# EAGLE board ECU (EAGLE 6.5.0)
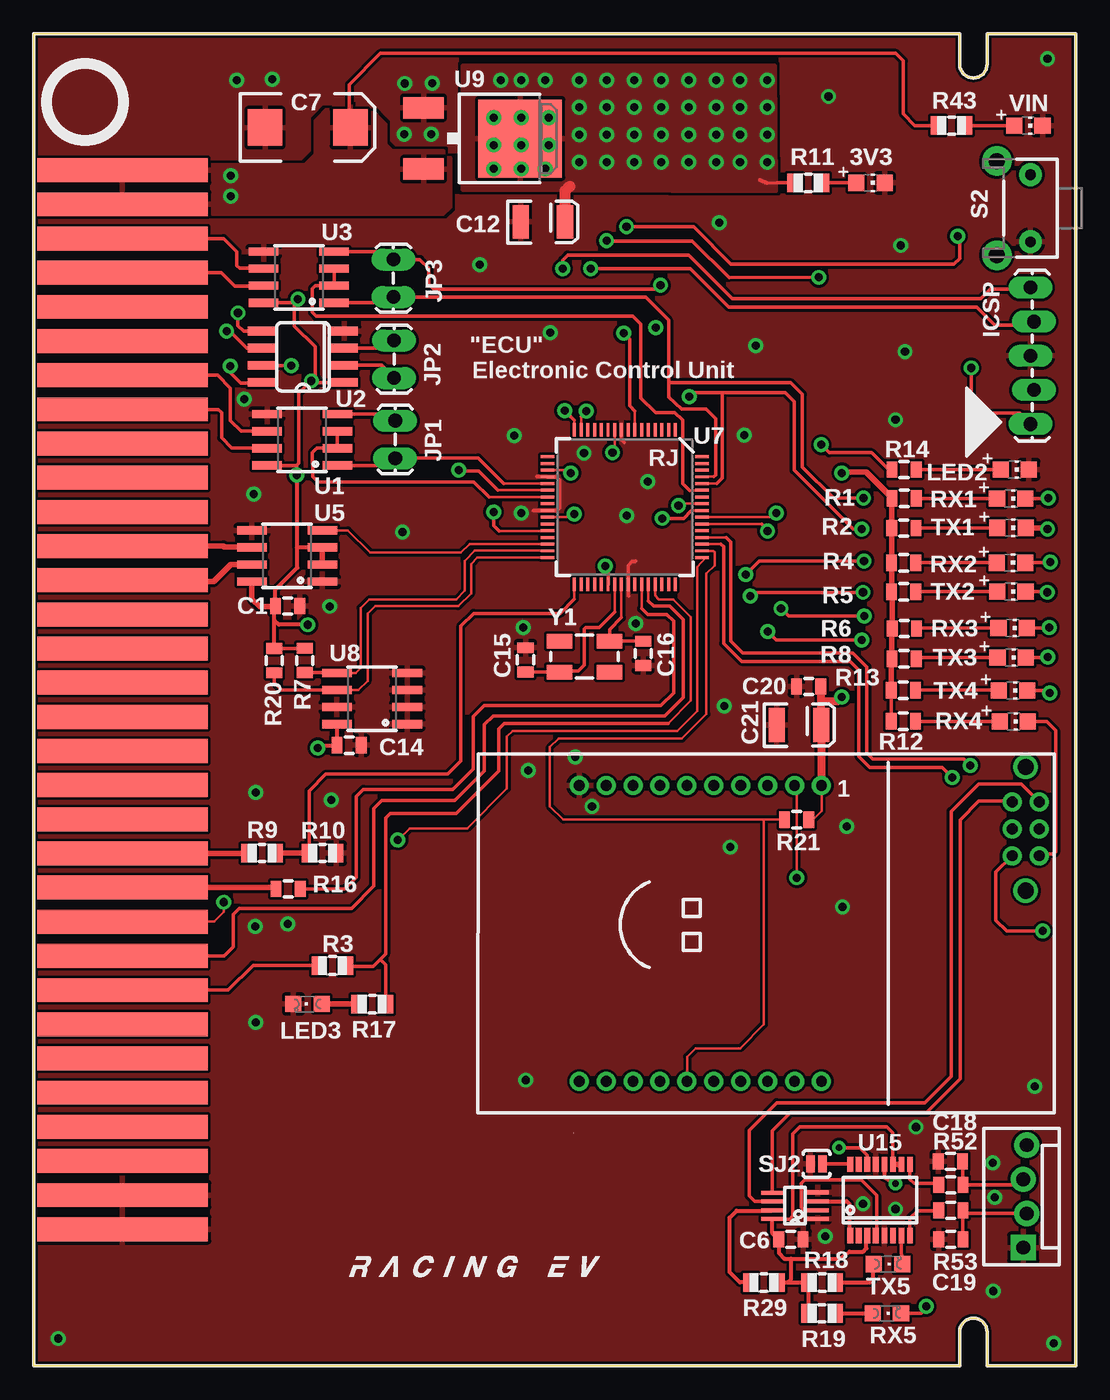
[diagram p0: board, top side]
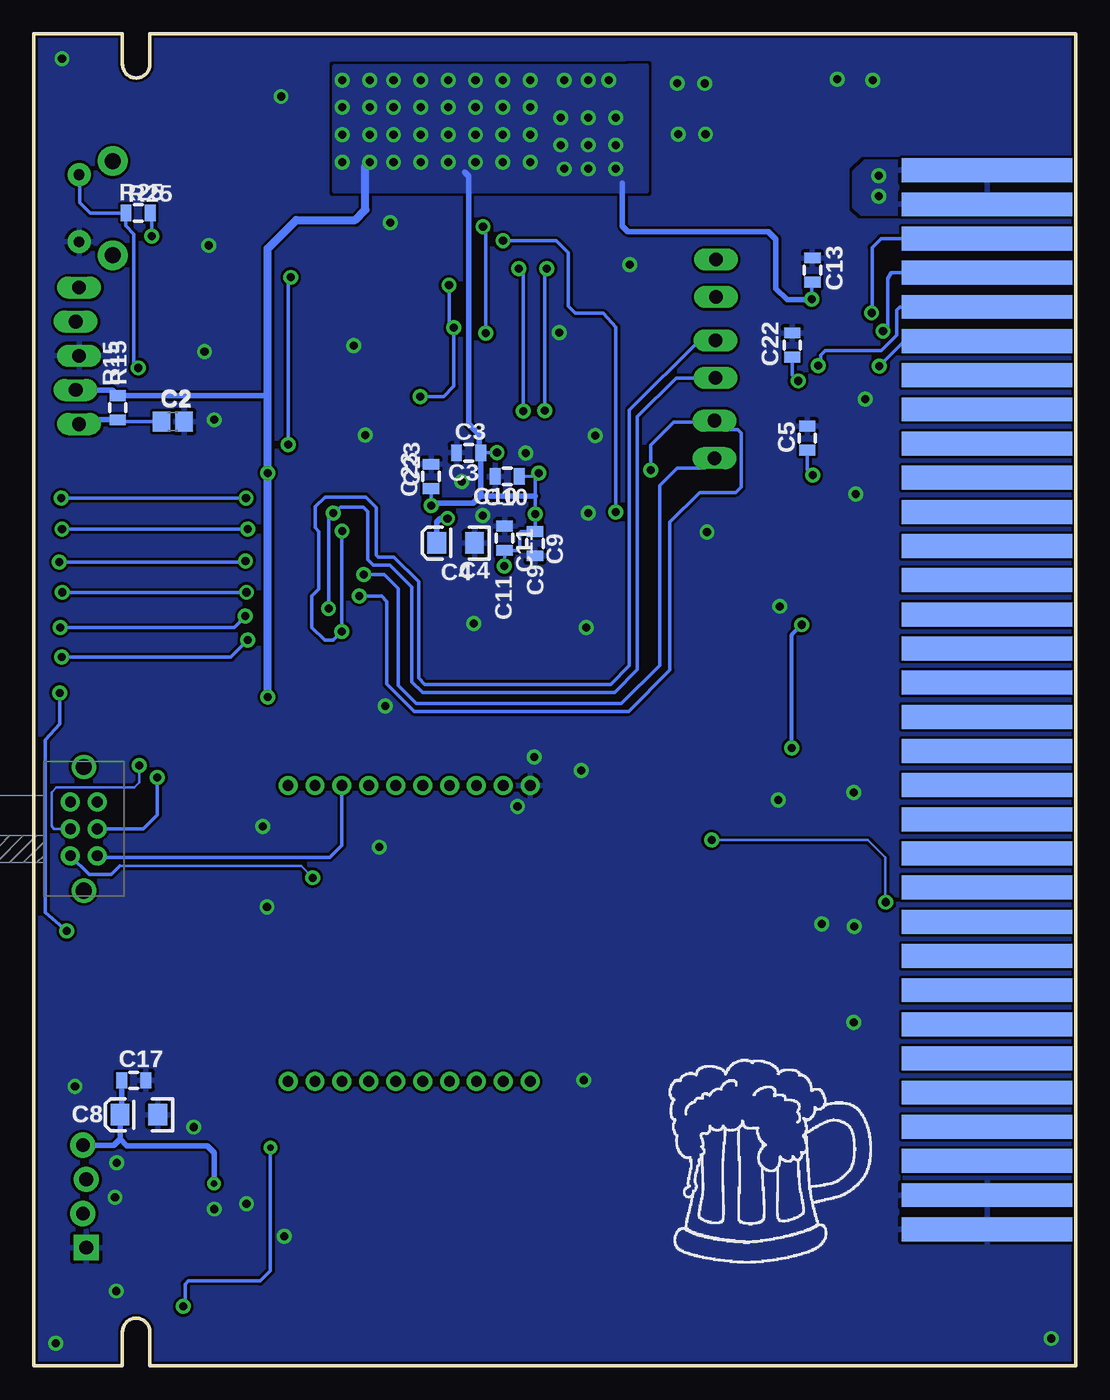
[diagram p1: board, bottom side, seen from below]

Size 77.47 x 99.06 mm. Coordinates in mm from the lower left corner, seen from the top.
Copper layers (1*16): Top 0.035mm / dielectric 1.5mm / Bottom 0.035mm
Design rules "SparkFun": minimum track width 8mil, minimum drill 20mil, track to track 8mil, track to pad 8mil, pad to pad 8mil, via to via 8mil, smd to smd 8mil, copper to edge 10mil, drill to drill 8mil, minimum pad ring 12mil, minimum via ring 10mil, stop-mask expansion 4mil, vias tented up to drill 25mil, thermal gap 10mil

## Footprints (pad centres in the part's own frame; a part is rotated, then mirrored left to right if it is on the bottom)
CHIP-LED0805 = smd 1.2 x 1.2: A 0,-1.05; C 0,1.05
0805 = smd 0.8 x 1.2: 1 -0.9,0; 2 0.9,0
C0805 = smd 1.3 x 1.5: 1 -0.85,0; 2 0.85,0
EIA3216 = smd 1.4 x 1.6: A 1.4,0; C -1.4,0
EIA7343 = smd 2.55 x 2.7: A 3.17,0; C -3.17,0
EIA3528 = smd 1.2 x 2.5: A 1.65,0; C -1.65,0
CARD-64 = smd 1.778 x 12.7: 1 10.16,6.604; 2 12.7,6.604; 3 15.24,6.604; 4 17.78,6.604; 5 20.32,6.604; 6 22.86,6.604; 7 25.4,6.604; 8 27.94,6.604; 9 30.48,6.604; 10 33.02,6.604; 11 35.56,6.604; 12 38.1,6.604; 13 40.64,6.604; 14 43.18,6.604; 15 45.72,6.604; 16 48.26,6.604; 17 50.8,6.604; 18 53.34,6.604; 19 55.88,6.604; 20 58.42,6.604; 21 60.96,6.604; 22 63.5,6.604; 23 66.04,6.604; 24 68.58,6.604; 25 71.12,6.604; 26 73.66,6.604; 27 76.2,6.604; 28 78.74,6.604; 29 81.28,6.604; 30 83.82,6.604; 31 86.36,6.604; 32 88.9,6.604 | smd 1.778 x 12.7 bottom: 33 10.16,6.604; 34 12.7,6.604; 35 15.24,6.604; 36 17.78,6.604; 37 20.32,6.604; 38 22.86,6.604; 39 25.4,6.604; 40 27.94,6.604; 41 30.48,6.604; 42 33.02,6.604; 43 35.56,6.604; 44 38.1,6.604; 45 40.64,6.604; 46 43.18,6.604; 47 45.72,6.604; 48 48.26,6.604; 49 50.8,6.604; 50 53.34,6.604; 51 55.88,6.604; 52 58.42,6.604; 53 60.96,6.604; 54 63.5,6.604; 55 66.04,6.604; 56 68.58,6.604; 57 71.12,6.604; 58 73.66,6.604; 59 76.2,6.604; 60 78.74,6.604; 61 81.28,6.604; 62 83.82,6.604; 63 86.36,6.604; 64 88.9,6.604
1X05_LOCK_LONGPADS = drill 1.016 long: 1 0,0; 2 2.54,-0.254; 3 5.08,0; 4 7.62,-0.254; 5 10.16,0
1X02_LOCK_LONGPADS = drill 1.016 long: 1 -0.127,0; 2 2.667,0
MOLEX-1X4_LOCK = drill 1.016 pad 1.88 square: 1 0,0.127 | drill 1.016 pad 1.88: 2 2.54,-0.127; 3 5.08,0.127; 4 7.62,-0.127
CHIPLED_0805 = smd 1.2 x 1.2: A 0,-1.05; C 0,1.05
R0805 = smd 1.1 x 1.4: 1 -1,0; 2 1,0
EG2211 = drill 0.8: P1 -1,0; P1-TA -1,2; P1-TB -1,-2; P2 1,0; P2-TA 1,2; P2-TB 1,-2 | drill 1.2: P$7 0,4.6; P$8 0,-4.6
TACTILE-PTH-SIDEEZ = drill 0.8 pad 1.7: 1 -2.5,0; 2 2.5,0 | drill 1.2 pad 2.2: ANCHOR1 -3.5,2.5; ANCHOR2 3.5,2.5
PAD-JUMPER-2-NO_YES_SILK = smd 0.635 x 1.27: 1 -0.45,0; 2 0.45,0
SO-8 = smd 0.61 x 2.21: 1 -1.905,-2.616; 2 -0.635,-2.616; 3 0.635,-2.616; 4 1.905,-2.616; 5 1.905,2.616; 6 0.635,2.616; 7 -0.635,2.616; 8 -1.905,2.616
SO08 = smd 0.66 x 2.032: 1 -1.905,-3.073; 2 -0.635,-3.073; 3 0.635,-3.073; 4 1.905,-3.073; 5 1.905,3.073; 6 0.635,3.073; 7 -0.635,3.073; 8 -1.905,3.073
VFSOP-8 = smd 0.3 x 1.6: 1 -0.98,-1.7; 2 -0.33,-1.7; 3 0.33,-1.7; 4 0.98,-1.7; 5 0.97,1.69; 6 0.325,1.7; 7 -0.33,1.7; 8 -0.98,1.71
RM024-TH = drill 0.8: 1 9,11; 2 7,11; 3 5,11; 4 3,11; 5 1,11; 6 -1,11; 7 -3,11; 8 -5,11; 9 -7,11; 10 -9,11; 11 -9,-11; 12 -7,-11; 13 -5,-11; 14 -3,-11; 15 -1,-11; 16 1,-11; 17 3,-11; 18 5,-11; 19 7,-11; 20 9,-11
TQFP-64 = smd 0.22 x 1: 1 -3.75,-5.75; 2 -3.25,-5.75; 3 -2.75,-5.75; 4 -2.25,-5.75; 5 -1.75,-5.75; 6 -1.25,-5.75; 7 -0.75,-5.75; 8 -0.25,-5.75; 9 0.25,-5.75; 10 0.75,-5.75; 11 1.25,-5.75; 12 1.75,-5.75; 13 2.25,-5.75; 14 2.75,-5.75; 15 3.25,-5.75; 16 3.75,-5.75; 33 3.75,5.75; 34 3.25,5.75; 35 2.75,5.75; 36 2.25,5.75; 37 1.75,5.75; 38 1.25,5.75; 39 0.75,5.75; 40 0.25,5.75; 41 -0.25,5.75; 42 -0.75,5.75; 43 -1.25,5.75; 44 -1.75,5.75; 45 -2.25,5.75; 46 -2.75,5.75; 47 -3.25,5.75; 48 -3.75,5.75 | smd 1 x 0.22: 17 5.75,-3.75; 18 5.75,-3.25; 19 5.75,-2.75; 20 5.75,-2.25; 21 5.75,-1.75; 22 5.75,-1.25; 23 5.75,-0.75; 24 5.75,-0.25; 25 5.75,0.25; 26 5.75,0.75; 27 5.75,1.25; 28 5.75,1.75; 29 5.75,2.25; 30 5.75,2.75; 31 5.75,3.25; 32 5.75,3.75; 49 -5.75,3.75; 50 -5.75,3.25; 51 -5.75,2.75; 52 -5.75,2.25; 53 -5.75,1.75; 54 -5.75,1.25; 55 -5.75,0.75; 56 -5.75,0.25; 57 -5.75,-0.25; 58 -5.75,-0.75; 59 -5.75,-1.25; 60 -5.75,-1.75; 61 -5.75,-2.25; 62 -5.75,-2.75; 63 -5.75,-3.25; 64 -5.75,-3.75
SO08' = smd 0.61 x 2.21: 1 -1.905,-2.616; 2 -0.635,-2.616; 3 0.635,-2.616; 4 1.905,-2.616; 5 1.905,2.616; 6 0.635,2.616; 7 -0.635,2.616; 8 -1.905,2.616
V-REG_DPACK = smd 1.6 x 3: 1 -2.28,-4.8; 3 2.28,-4.8 | smd 5.8 x 6.2: 4 0,2.38
SSOP-16 = smd 0.419 x 1.143: 1 -2.223,-2.642; 2 -1.587,-2.642; 3 -0.953,-2.642; 4 -0.318,-2.642; 5 0.318,-2.642; 6 0.953,-2.642; 7 1.587,-2.642; 8 2.223,-2.642; 9 2.223,2.642; 10 1.587,2.642; 11 0.953,2.642; 12 0.318,2.642; 13 -0.318,2.642; 14 -0.953,2.642; 15 -1.587,2.642; 16 -2.223,2.642
CRYSTAL-SMD-5X3 = smd 1.9 x 1.1: 1 -1.85,-1.15; 2 1.85,-1.15; 3 1.85,1.15; 4 -1.85,1.15

## Placement (x,y rotation side)
3V3  [CHIP-LED0805]  62.2,87.96 270 top
C1  0.1uF  [0805]  18.88,56.5 0 top
C2  10n  [C0805]  67.13,70.22 0 bottom
C3  0.1uF  [0805]  45.14,67.89 180 bottom
C4  10uF  [EIA3216]  46.1,61.19 180 bottom
C5  0.1uF  [0805]  19.96,68.99 90 bottom
C6  0.1uf  [0805]  56.29,9.4 0 top
C7  10uF  [EIA7343]  20.37,92.08 0 top
C8  4.7uF  [EIA3216]  69.65,18.67 180 bottom
C9  0.1uF  [0805]  40.21,61.14 270 bottom
C10  0.1uF  [0805]  42.27,66.14 180 bottom
C11  0.1uF  [0805]  42.47,61.54 270 bottom
C12  10uf  [EIA3528]  37.85,85.06 0 top
C13  0.1uF  [0805]  19.58,81.48 90 bottom
C14  0.1uF  [0805]  23.46,46.15 0 top
C15  12pF  [0805]  36.56,52.5 90 top
C16  12pF  [0805]  45.3,52.97 270 top
C17  0.1uf  [0805]  70.03,21.23 0 bottom
C18  47pf  [0805]  68.15,15.21 180 top
C19  47pf  [0805]  68.17,9.4 180 top
C20  0.1uF  [0805]  57.61,50.52 180 top
C21  10uf  [EIA3528]  56.9,47.65 0 top
C22  0.1uF  [0805]  21.08,75.91 90 bottom
C23  0.1uF  [0805]  47.93,66.14 90 bottom
CARD1  CARD  [CARD-64]  0,99.06 270 top
ICSP  ICSP  [1X05_LOCK_LONGPADS]  74.09,70.03 90 top
JP1  M02LOCK_LONGPADS  [1X02_LOCK_LONGPADS]  26.87,70.15 270 top
JP2  M02LOCK_LONGPADS  [1X02_LOCK_LONGPADS]  26.8,76.12 270 top
JP3  M02LOCK_LONGPADS  [1X02_LOCK_LONGPADS]  26.75,82.14 270 top
JP13  [MOLEX-1X4_LOCK]  73.69,8.79 90 top
LED2  [CHIP-LED0805]  72.92,66.65 270 top
LED3  Green  [CHIPLED_0805]  20.36,26.91 90 top
R1  1k  [0805]  64.71,64.51 0 top
R2  1k  [0805]  64.68,62.3 0 top
R3  0  [R0805]  22.21,29.76 0 top
R4  1k  [0805]  64.67,59.72 0 top
R5  1k  [0805]  64.67,57.56 0 top
R6  1k  [0805]  64.72,54.84 0 top
R7  2k  [0805]  20.14,52.45 90 top
R8  1k  [0805]  64.69,52.58 0 top
R9  30k  [R0805]  16.98,38.13 180 top
R10  10k  [R0805]  21.48,38.13 180 top
R11  499  [R0805]  57.57,87.96 180 top
R12  1k  [0805]  64.64,47.93 0 top
R13  1k  [0805]  64.64,50.24 0 top
R14  499  [0805]  64.69,66.65 180 top
R15  10k  [0805]  71.21,71.25 90 bottom
R16  1k  [0805]  18.92,35.47 0 top
R17  1k  [R0805]  25.17,26.9 0 top
R18  1K  [R0805]  58.6,6.2 180 top
R19  1k  [R0805]  58.6,3.91 180 top
R20  2k  [0805]  17.89,52.44 90 top
R21  1k  [0805]  56.72,40.61 180 top
R25  499  [0805]  69.7,85.72 0 bottom
R29  1K  [R0805]  54.28,6.2 0 top
R43  1k  [R0805]  68.22,92.23 180 top
R52  27  [0805]  68.17,13.46 180 top
R53  27  [0805]  68.17,11.56 180 top
RX1  [CHIP-LED0805]  72.65,64.5 270 top
RX2  [CHIP-LED0805]  72.64,59.72 270 top
RX3  [CHIP-LED0805]  72.77,54.86 270 top
RX4  [CHIP-LED0805]  72.85,47.9 270 top
RX5  [CHIPLED_0805]  63.42,3.91 270 top
S1  [EG2211]  73.74,39.93 0 bottom
S2  ts  [TACTILE-PTH-SIDEEZ]  74.09,86.08 90 top
SJ2  [PAD-JUMPER-2-NO_YES_SILK]  58.19,15.01 0 top
TX1  [CHIP-LED0805]  72.68,62.31 270 top
TX2  [CHIP-LED0805]  72.67,57.58 270 top
TX3  [CHIP-LED0805]  72.69,52.68 270 top
TX4  [CHIP-LED0805]  72.8,50.22 270 top
TX5  [CHIPLED_0805]  63.5,7.57 270 top
U1  SN75HVD08DR  [SO-8]  19.96,68.86 90 top
U2  ISL83077  [SO08]  20.02,75.03 90 top
U3  SN75HVD08DR  [SO-8]  19.71,80.95 90 top
U4  SN74LVC2G241DCTR  [VFSOP-8]  56.59,11.91 90 top
U5  SN75HVD08DR  [SO-8]  18.85,60.22 90 top
U6  RM024  [RM024-TH]  49.56,32.16 0 top
U7  DSPIC33EP256GM306  [TQFP-64]  43.94,63.86 180 top
U8  CAT24M01WI-GT3  [SO08']  25.16,49.62 90 top
U9  NCP1117DT33T5G  [V-REG_DPACK]  33.78,91.26 270 top
U15  FT230X  [SSOP-16]  62.92,12.34 0 top
U$1  INDPK1  [PICKIT-PIN-1]  71.89,70.18 90 top
U$2  LOGOM  [L-M]  15.95,4.6 0 top
U$3  BEERM  [B-M]  30.23,7.65 0 bottom
VIN  [CHIP-LED0805]  73.94,92.2 270 top
Y1  12Mhz  [CRYSTAL-SMD-5X3]  40.94,52.73 0 top

## Library data of the parts
3V3 C2 LED2 LED3 R3 R9-R11 R17-R19 R29 R43 RX1-RX5 TX1-TX5 VIN = adafruit
C1 C3 C5 C7 C9-C16 C20-C23 = SparkFun-Capacitors
C4 = SparkFun-Capacitors; PROD_ID: CAP-00811
C6 C8 C17-C19 = SparkFun
CARD1 U1 U3 U5-U7 U15 U$1 = FSAE Eletric
ICSP JP1-JP3 JP13 = SparkFun-Connectors
R1 R2 R4-R8 R12-R16 R20 R21 R52 R53 SJ2 = SparkFun-Passives
R25 = SparkFun-Resistors
S1 S2 = SparkFun-Electromechanical
U2 = NASA_LIB
U4 = Cleaverbrooks
U8 = SparkFun-DigitalIC
U9 = SparkFun-PowerIC
U$2 U$3 = Pic
Y1 = SparkFun-FreqCtrl

## Nets
3V: C6.1 R18.2 R19.2 R29.2 U4.8 U15.3 U15.10 U15.11
+3V3: C1.1 C3.1 C5.1 C9.1 C10.1 C11.2 C12.A C13.1 C14.1 C20.1 C21.A C22.1 C23.1 ICSP.2 R1.1 R2.1 R4.1 R5.1 R6.1 R7.2 R8.1 R11.2 R12.1 R13.1 R15.2 R20.2 R21.1 U1.8 U2.1 U3.8 U5.2 U5.3 U5.8 U6.1 U7.10 U7.19 U7.26 U7.38 U7.57 U8.8 U9.4
+9V: C7.A CARD1.1 CARD1.2 CARD1.33 CARD1.34 R43.2 U9.3
BRAKELIGHT: CARD1.24 U7.44
ECU-SS-IN: CARD1.21 R9.2
GND: 3V3.C C1.2 C2.2 C3.2 C4.C C5.2 C6.2 C7.C C8.C C9.2 C10.2 C11.1 C12.C C13.2 C14.2 C15.2 C16.2 C17.2 C18.2 C19.2 C20.2 C21.C C22.2 C23.2 CARD1.31 CARD1.32 CARD1.63 CARD1.64 ICSP.3 JP13.1 LED2.C LED3.C R10.1 S2.1 SJ2.1 U1.5 U2.4 U3.5 U4.1 U4.4 U5.1 U5.5 U6.10 U7.9 U7.20 U7.25 U7.41 U8.1 U8.2 U8.3 U8.4 U8.7 U9.1 U15.5 U15.13 VIN.C
HORN: CARD1.22 R16.1
HORNEN: CARD1.23 U7.49
INRG: R21.2 U6.15 U7.50
LED-A: CARD1.12 U5.6
LED-B: CARD1.13 U5.7
LED-DATA: U5.4 U7.30
N$1: U7.46
N$2: R14.2 U7.28
N$3: 3V3.A R11.1
N$4: R18.1 TX5.A
N$5: R4.2 RX2.A
N$6: R5.2 TX2.A
N$7: R1.2 RX1.A
N$8: R2.2 TX1.A
N$9: R6.2 RX3.A
N$10: R8.2 TX3.A
N$11: R12.2 RX4.A
N$12: R13.2 TX4.A
N$13: C16.1 U7.40 Y1.3
N$14: C15.1 U7.39 Y1.1
N$15: LED2.A R14.1
N$16: R7.1 U7.31 U8.5
N$18: R19.1 RX5.A
N$19: TX5.C U15.7
N$20: RX5.C U15.14
N$21: U4.2 U15.4
N$27: U4.3 U15.1
N$28: R52.2 U15.9
N$32: R20.1 U7.32 U8.6
N$33: R43.1 VIN.A
N$49: LED3.A R17.1
N$54: R53.2 U15.8
N$55: C18.1 JP13.3 R52.1
N$61: C19.1 JP13.2 R53.1
N$62: SJ2.2 U15.16
N$69: R29.1 U4.7
N$85: C8.A C17.1 JP13.4 U15.12
N$86: C2.1 ICSP.1 R15.1 R25.1 S2.2
N$87: R25.2 U7.7
N$88: C4.A U7.56
N$90: ICSP.4 U7.15
N$91: ICSP.5 U7.16
RS485-1-A: CARD1.3 U3.6
RS485-1-B: CARD1.4 U3.7
RS485-2-A: CARD1.7 U1.6
RS485-2-B: CARD1.8 U1.7
RS-TM-A: CARD1.38 U2.8
RS-TM-B: CARD1.37 U2.7
RS-TM-Y: CARD1.35 U2.5
RS-TM-Z: CARD1.36 U2.6
RTD-HORN: R16.2 U7.43
RX: S1.P1 U7.52
RXD0: JP3.2 RX1.C U3.1 U7.61
RXD1: JP1.2 RX2.C U1.1 U7.21
RXD2: JP2.2 RX3.C U2.2 U7.55
RXD3: S1.P1-TA U4.6
RXD4: RX4.C S1.P1-TB U6.2
SS: R3.2 R17.2 U7.45
SS-D: R9.1 R10.2 U7.33
SS-ECU-RELAY: CARD1.25 R3.1
TX: S1.P2 U7.51
TXD0: JP3.1 TX1.C U3.4 U7.60
TXD1: JP1.1 TX2.C U1.4 U7.22
TXD2: JP2.1 TX3.C U2.3 U7.54
TXD3: S1.P2-TA U4.5
TXD4: S1.P2-TB TX4.C U6.3
U1-EN: U1.2 U1.3 U7.23
U3-EN: U3.2 U3.3 U7.59

## Tracks (layer width: path | path; a pad name or v marks a point on that pad's centre or on a via)
3V
  Top 0.254: U15.11 63.87,17.31 63.42,17.75 56.95,17.75 56.44,17.25 56.44,11.15 56.19,10.9 54.92,10.9 U4.8
  Top 0.305: 61.9,9.77 U15.3 61.9,9.64 61.9,8.74 61.65,8.48 60.63,8.48 59.87,7.98 56.31,7.98 | U4.8 54.88,9.9 C6.1 55.39,8.39 55.8,7.98 56.31,7.98 | 56.31,7.98 56.31,6.45 56.06,6.2 R29.2 R18.2 R19.2
  Top 0.406: U15.10 U15.11 64.29,14.99 64.44,14.83
+3V3  (via drill 0.6)
  Top 0.203: U7.26 39.94,63.11 | U7.19 39.72,66.61 | 48.13,64.11 U7.57 | U7.10 43.19,68.08 | R21.1 57.94,40.62 58.57,41.25 58.57,43.14 U6.1
  Top 0.254: 39.94,63.11 v40.18,63.35 | 39.72,66.61 v39.93,66.4 | v47.93,63.98 48.01,63.98 48.13,64.11 | 43.19,68.08 v43.03,67.92 | U7.38 42.69,59.19 v42.49,59.46 | R12.1 R13.1 | R11.2 55.27,87.96 54.51,87.95 | U3.8 19.38,79.05 | 19.38,79.05 v19.65,79.31 | v20.65,73.24 20.79,73.1 23.06,73.1 U2.1 | 19.38,79.05 19.38,77.32 20.92,75.78 20.92,73.51 v20.65,73.24 | U1.8 19.53,66.95 | 19.53,66.95 19.72,67.14 19.72,72.31 v20.65,73.24 | v19.56,66.23 19.56,66.93 19.53,66.95 | 18.2,56.72 C1.1 | 19.57,60.86 19.56,60.87 | R7.2 20.13,53.34 R20.2
  Top 0.305: 54.51,87.95 54,88.16 | 58.55,50.48 58.55,49.48 58.6,49.43 | C14.1 22.56,47.7 U8.8 22.54,46.2 22.43,46.09 21.26,46.09 v21.12,45.95 | v20.38,55.1 18.22,55.1 17.89,55.44 | R20.2 17.89,55.44 | 17.89,55.44 17.89,56.41 C1.1 17.93,56.55 17.93,57.68 19.61,59.36 19.61,60.82 19.56,60.87 19.56,60.98 | v19.56,66.23 19.56,60.98 | U5.3 19.68,60.86 19.56,60.98
  Top 0.406: R13.1 63.74,52.53 R8.1 63.79,54.81 R6.1 63.82,57.51 R5.1 R4.1 63.77,62.28 R2.1 63.78,64.48 R1.1 63.81,64.54 61.87,66.47 60.15,66.47 v60.07,66.4 | U5.8 16.23,57.02 16.8,56.45 17.93,56.45 C1.1 | U5.3 U5.2
  Top 0.61: U6.1 58.55,43.17 C21.A 58.55,50.48 C20.1 | 58.6,49.43 59.77,49.43 v60.07,49.73
  Top 0.813: C12.A 39.5,87.35 39.85,87.71
  Bottom 0.254: C10.1 40.16,66.15 v39.93,66.4 40.18,66.14 40.18,64.67 v40.18,63.35 40.18,62.06 C9.1 41.26,62.04 41.35,61.95 41.35,60.81 41.53,60.63 42.45,60.63 C11.2 v42.49,59.46 | C23.1 v47.93,63.98 | v43.03,67.92 44.21,67.92 C3.1 | v19.65,79.31 19.65,80.52 C13.1 | C22.1 21.08,73.67 v20.65,73.24 | C5.1 19.96,66.64 v19.56,66.23
  Bottom 0.305: v21.12,45.95 21.12,54.37 v20.38,55.1
  Bottom 0.406: 44.24,64.73 C3.1 44.35,68.01 44.35,69.24 45.14,70.03 45.14,88.47 45.41,88.75 | 44.24,64.73 44.17,64.67 40.18,64.67 | 44.24,64.73 44.24,64.7 44.78,64.16 47.75,64.16 v47.93,63.98 | ICSP.2 71.63,72.57 R15.2 60.12,72.15 60.07,72.2 | 33.72,87.92 33.72,84.76 33.3,84.34 22.86,84.34 22.3,83.78 22.3,80.11 21.46,79.27 19.68,79.27 v19.65,79.31
  Bottom 0.61: v60.07,49.73 v60.07,66.4 60.07,72.2 60.07,83.08 57.96,85.19 53.57,85.19 52.81,85.95 52.81,89.2 v52.5,89.51
  other vias: 34.72,95.61 36.25,95.61 38.02,95.61 40.56,95.61 40.56,93.57 40.56,91.54 40.56,89.51 42.6,95.61 42.6,93.57 42.6,91.54 42.6,89.51 44.63,95.61 44.63,93.57 44.63,91.54 44.63,89.51 46.66,95.61 46.66,93.57 46.66,91.54 46.66,89.51 48.69,95.61 48.69,93.57 48.69,91.54 48.69,89.51 50.72,95.61 50.72,93.57 50.72,91.54 50.72,89.51 52.5,95.61 52.5,93.57 52.5,91.54 54.53,95.61 54.53,93.57 54.53,91.54 54.53,89.51 34.21,90.78 36.25,90.78 34.21,89 36.25,89 38.02,89 38.28,90.78 38.28,92.81 36.25,92.81 34.21,92.81
  pour Bottom: 33.15,96.6 55.09,96.6 55.09,87.38 31.93,87.38 31.93,96.62 33.2,96.62
  pour Top: 31.93,96.62 55.04,96.62 55.12,87.39 31.93,87.48
+9V  (via drill 0.6)
  Top 0.254: R43.2 65.51,92.23 64.64,93.09 64.64,97.03 64.08,97.59 25.78,97.59 23.47,95.28 23.47,92.15 C7.A
  other vias: 14.66,88.49 14.66,86.97
  pour Top: 7.04,89.26 20.24,89.26 21.01,90.02 21.01,92.56 22.02,93.57 24.82,93.57 26.09,92.3 26.09,90.78 26.59,90.27 30.4,90.27 30.91,89.76 30.91,86.21 30.4,85.7 6.53,85.7 6.02,86.21 6.02,88.24
  pour Bottom: 5.77,89.51 15.67,89.51 16.43,88.75 16.43,86.21 15.93,85.7 5.77,85.7
BRAKELIGHT
  Top 0.203: 45.7,56.87 U7.44
  Top 0.254: CARD1.24 14.16,30.48 14.83,31.15 14.83,33.57 15.29,34.02 23.64,34.02 25.29,35.67 25.29,41.45 25.86,42.02 31.29,42.02 33.5,44.23 33.5,47.68 34.16,48.34 46.91,48.34 48.27,49.7 48.27,55.5 47.28,56.49 46.08,56.49 45.7,56.87
ECU-SS-IN
  Top 0.406: CARD1.21 15.98,38.1 R9.2
GND  (via drill 0.6)
  Top 0.203: U7.9 43.69,68.88
  Top 0.254: 37.52,66.14 37.39,66.14 37.42,66.11 U7.20 38.86,66.1 39.12,65.85 39.12,63.79 38.93,63.61 U7.25 37.14,63.61 37.13,63.6 | 44.22,57.25 44.19,57.28 U7.41 44.19,59.51 44.48,59.79 44.7,59.79 44.76,59.84 | 43.69,68.88 43.92,68.66
  other vias: 1.83,2.03 75.36,97.21 75.82,1.68 64.06,70.35 71.32,5.56 61.65,12.04 58.85,9.63 64.06,11.66 65.58,17.75 71.42,12.55 71.3,15.09 27.58,95.35 29.62,95.38 27.53,91.59 29.57,91.59 45.64,65.76 40.91,67.87 44.09,63.22 15.09,95.58 17.74,95.67 15.66,71.89 35.74,69.16 27.42,62 36.25,63.41 44.75,55.19 38.4,76.82 53.67,75.87 33.15,81.88 50.95,85 64.44,83.31 64.77,75.43 52.83,69.22 40.27,45.26 51.35,49.07 59.08,94.39 36.39,54.89 22.12,42.08 16.48,32.68 18.88,32.87 16.37,64.83 22.02,56.48 16.51,42.62 16.52,25.54 41.5,41.59 60.43,40.12 60.12,34.12 51.79,38.57 36.58,21.25 36.75,44.26 74.4,20.79
  pour Top (rank 4): 0,0 77.44,0.05 77.44,99.03 0.1,99.18
  pour Bottom (rank 4): 0,-0.05 77.47,0.13 77.47,99.16 0.08,99.21
HORN
  Top 0.406: CARD1.22 18.02,35.56 R16.1
HORNEN  (via drill 0.6)
  Top 0.203: U7.49 49.94,60.11 49.31,59.4 49.31,48.7 47.83,47.22 35.6,47.22 35.18,46.8 35.18,42.93 32.22,39.97 27.94,39.97 v27.08,39.1 | v14.13,34.48 14.13,33.77 13.42,33.06 6.64,33.06 CARD1.23
  Bottom 0.203: v27.08,39.1 15.47,39.1 14.16,37.8 14.16,34.51 v14.13,34.48
INRG
  Top 0.203: R21.2 54.28,40.62 | 54.28,40.62 54.28,25.38 52.53,23.62 49.2,23.62 48.56,22.99 U6.15 | 54.28,40.62 39.37,40.62 38.38,41.6 38.38,46 39.01,46.63 48.18,46.63 50.01,48.46 50.01,58.9 50.62,59.51 50.62,60.5 50.52,60.6 U7.50
LED-A
  Top 0.406: CARD1.12 14.1,60.96 14.19,60.87 16.22,60.87 U5.6
LED-B
  Top 0.406: U5.7 14.67,59.59 13.39,58.31 6.72,58.31 CARD1.13
LED-DATA
  Top 0.203: U5.4 23.36,62.13 25.02,60.47 31.76,60.47 32.41,61.11 U7.30
N$2  (via drill 0.6)
  Top 0.203: 34.59,62.09 38.18,62.09 U7.28
  Top 0.254: R14.2 63.55,66.65 62.29,67.91 59.13,67.91 v58.55,68.49 | v58.36,80.94 51.7,80.92 48.96,83.63 42.61,83.63 v42.58,83.66 | v34.19,63.5 34.19,62.5 34.59,62.09
  Bottom 0.254: v58.55,68.49 58.55,80.76 v58.36,80.94 | v42.58,83.66 38.63,83.66 37.74,82.77 37.74,78.8 37.21,78.27 35.14,78.27 34.2,77.25 34.2,63.87 v34.19,63.5
N$3
  Top 0.254: R11.1 3V3.A
N$4
  Top 0.305: R18.1 62.15,6.2 62.41,6.45 62.41,7.53 TX5.A
N$5
  Top 0.254: RX2.A R4.2
N$6
  Top 0.254: TX2.A 65.59,57.58 R5.2
N$7
  Top 0.254: RX1.A 65.62,64.5 R1.2
N$8
  Top 0.254: R2.2 71.61,62.3 TX1.A
N$9
  Top 0.254: RX3.A 65.64,54.86 R6.2
N$10
  Top 0.254: TX3.A 65.69,52.68 R8.2
N$11
  Top 0.254: RX4.A 65.57,47.9 R12.2
N$12
  Top 0.254: R13.2 71.72,50.24 TX4.A
N$13
  Top 0.203: U7.40 43.69,55.64
  Top 0.254: 43.69,55.64 42.81,54.76 42.81,53.9 Y1.3 C16.1
N$14
  Top 0.203: U7.39 43.19,56.07
  Top 0.254: 43.19,56.07 42.04,54.91 41.05,54.91 40.92,54.79 40.92,52.12 40.46,51.66 39.18,51.66 Y1.1 39.07,51.6 C15.1
N$15
  Top 0.254: LED2.A R14.1
N$16
  Top 0.203: U7.31 32.78,60.61 32.03,59.85 32.03,57.63 31.39,57 24.96,57 24.31,56.35 24.31,51.91 23.93,51.52 22.04,51.52 22.01,51.55
  Top 0.254: R7.1 22.01,51.55 22.52,51.55 U8.5
N$18
  Top 0.305: R19.1 RX5.A
N$19
  Top 0.254: U15.7 64.5,8.54 TX5.C
N$20  (via drill 0.5, 0.6)
  Top 0.254: U15.14 61.96,15.66 61.39,16.23 v59.87,16.23 | v66.34,4.42 66.34,4.29 65.96,3.91 RX5.C
  Bottom 0.254: v59.87,16.23 59.87,7.09 60.63,6.33 65.96,6.33 66.22,6.07 66.22,4.55 v66.34,4.42
N$21
  Top 0.254: U4.2 57.28,11.58 57.07,11.79 57.07,13.56 57.33,13.82 61.52,13.82 62.66,12.68 62.66,9.77 U15.4
N$27
  Top 0.305: U4.3 60.43,12.24 60.63,12.04 60.63,9.77 U15.1
N$28
  Top 0.254: U15.9 65.14,13.88 65.46,13.56 67.1,13.56 R52.2
N$32
  Top 0.203: U7.32 32.99,60.11 32.51,59.63 32.51,57.44 31.56,56.49 25.38,56.49 24.82,55.93 24.82,50.93 24.13,50.24 22.55,50.24 U8.6
  Top 0.254: R20.1 17.89,50.8 18.44,50.25 U8.6
N$33
  Top 0.254: VIN.A 69.25,92.2 R43.1
N$49
  Top 0.406: R17.1 LED3.A
N$54
  Top 0.254: U15.8 65.14,10.96 65.71,11.53 67.25,11.53 R53.2
N$55
  Top 0.254: JP13.3 73.1,13.46 R52.1 C18.1
N$61
  Top 0.254: JP13.2 69.3,11.33 R53.1 C19.1
N$62
  Top 0.254: SJ2.2 60.67,15.01 U15.16
N$69
  Top 0.305: R29.1 52.5,6.2 51.74,6.96 51.74,11.02 52.25,11.53 54.84,11.53 U4.7
N$85  (via drill 0.5)
  Top 0.305: U15.12 63.23,14.01 v64.06,13.56
  Bottom 0.406: JP13.4 71.5,16.41 71.04,16.87 | 71.04,16.87 C8.A 70.93,18.79 C17.1 | v64.06,13.56 64.06,15.85 64.57,16.36 70.54,16.36 71.04,16.87
N$86  (via drill 0.6)
  Top 0.254: v69.69,74.21 69.69,71.13 69.99,70.83 73.29,70.83 ICSP.1
  Bottom 0.254: R25.1 70.66,85.72 | S2.2 74.04,88.53 74.04,86.49 73.28,85.72 70.66,85.72 | C2.1 71.08,70.22 R15.1 | 70.66,85.72 70.64,85.7 70.64,84.77 70.02,84.15 70.02,74.54 v69.69,74.21
  Bottom 0.406: R15.1 73.77,70.35 ICSP.1
N$87  (via drill 0.6)
  Top 0.203: U7.7 44.69,71
  Top 0.254: 44.69,71 44.31,71.39 44.31,76.33 v43.85,76.78 | v44.07,84.7 49.05,84.7 51.83,81.9 68.39,81.9 68.82,82.33 68.82,83.86 v68.68,84
  Bottom 0.254: v43.85,76.78 43.85,84.48 v44.07,84.7 | v68.68,84 68.68,85.61 R25.2
N$88  (via drill 0.6)
  Top 0.203: 48.9,63.6 U7.56
  Top 0.254: v46.71,63.02 48.31,63.02 48.9,63.6
  Bottom 0.406: C4.A 47.5,62.76 47.24,63.02 v46.71,63.02
N$90  (via drill 0.6)
  Top 0.203: U7.15 40.69,70.6
  Top 0.254: 40.69,70.6 v41.08,70.99 | v41.41,81.6 48.79,81.6 51.66,78.73 70.12,78.73 71.45,77.39 74.09,77.39 ICSP.4
  Bottom 0.254: v41.08,70.99 41.08,81.27 v41.41,81.6
N$91  (via drill 0.6)
  Top 0.203: U7.16 40.19,70.32
  Top 0.254: 40.19,70.32 39.92,70.6 39.9,70.6 v39.47,71.03 | v39.32,81.58 39.32,82.23 39.69,82.6 48.68,82.6 51.92,79.36 70.41,79.36 71.12,80.07 73.98,80.07 ICSP.5
  Bottom 0.254: v39.47,71.03 39.47,81.43 v39.32,81.58
RS485-1-A
  Top 0.254: CARD1.3 14.12,83.82 15.11,82.83 15.11,81.81 15.32,81.61 17.07,81.61 U3.6
RS485-1-B
  Top 0.254: CARD1.4 13.95,81.28 14.94,80.29 17.07,80.29 U3.7
RS485-2-A
  Top 0.254: CARD1.7 13.69,73.66 14.63,72.72 14.63,70.28 15.42,69.49 U1.6
RS485-2-B
  Top 0.254: CARD1.8 13.72,71.12 13.97,70.87 13.97,69.01 14.73,68.25 17.32,68.25 U1.7
RS-TM-A  (via drill 0.6)
  Top 0.254: v14.61,74.35 14.61,73.86 15.39,73.08 16.89,73.08 U2.8
  Bottom 0.254: CARD1.38 12.75,76.2 v14.61,74.35
RS-TM-B  (via drill 0.6)
  Top 0.254: v19.15,74.37 16.97,74.37 U2.7
  Bottom 0.254: CARD1.37 11.3,78.74 | 11.3,78.74 12.62,79.05 | 11.3,78.74 13.08,78.74 13.31,78.51 13.31,76.66 14.48,75.49 18.62,75.49 18.95,75.16 18.95,74.57 v19.15,74.37
RS-TM-Y  (via drill 0.6)
  Top 0.254: v15.19,78.3 15.19,77.33 15.63,76.92 U2.5
  Bottom 0.254: CARD1.35 14.48,83.82 15.14,83.16 15.14,78.54 v15.19,78.3
RS-TM-Z  (via drill 0.6)
  Top 0.254: v14.34,76.94 14.58,76.94 15.85,75.67 U2.6
  Bottom 0.254: CARD1.36 13.72,81.28 13.97,80.85 13.98,77.22 v14.34,76.94
RTD-HORN
  Top 0.203: U7.43 45.19,56.31
  Top 0.254: R16.2 23.13,35.47 23.98,36.32 23.98,42.34 24.51,42.88 31.17,42.88 32.68,44.39 32.68,48.28 33.48,49.09 46.62,49.09 47.56,50.02 47.56,55.37 47.07,55.87 45.63,55.87 45.19,56.31
RX  (via drill 0.6)
  Top 0.203: U7.52 51.48,61.61
  Top 0.254: 51.48,61.61 51.82,61.27 51.82,53.9 52.7,53.01 60.88,53.01 61.92,51.97 61.92,45.57 62.36,45.14 69.14,45.14 v69.62,44.65
  Bottom 0.203: v69.62,44.65 69.62,43.4 70,43.02 75.79,43.02 76.12,42.65 76.12,40.16 75.96,39.94 74.75,39.94 S1.P1
RXD0  (via drill 0.6)
  Top 0.203: U7.61 50.56,66.11
  Top 0.254: U3.1 26.31,79.05 JP3.2 45.49,79.48 47.21,77.75 47.2,72.99 | RX1.C 75.41,64.5 v75.42,64.52 | v61.68,64.52 59.46,64.52 57.14,66.84 57.14,72.25 56.29,73.1 47.31,73.1 47.2,72.99 | 50.56,66.11 50.7,66.24 50.7,70.43 49.99,71.14 48.16,71.14 47.22,72.03 47.22,72.97 47.2,72.99
  Bottom 0.254: v75.42,64.52 v61.68,64.52 v61.67,64.53
RXD1  (via drill 0.6)
  Top 0.203: 34.95,65.62 U7.21
  Top 0.254: U1.1 26.34,66.95 JP1.2 33.05,67.5 34.95,65.62 | RX2.C 75.51,59.72 v75.56,59.77 | v61.72,59.85 53.94,59.85 v52.92,58.84
  Bottom 0.254: v75.56,59.77 61.81,59.77 v61.72,59.85 | v52.92,58.84 51.4,58.84 50.37,57.81 50.37,50.57 49.03,49.24 33.78,49.24 30.95,52.07 30.95,65.44 29.63,66.76 27.6,66.76 JP1.2
RXD2  (via drill 0.6)
  Top 0.203: U7.55 54.9,63.11
  Top 0.254: U2.2 25.86,74.4 JP2.2 | RX3.C 75.44,54.86 v75.49,54.91 | v61.73,55.75 56.12,55.75 v55.55,56.33 | 54.9,63.11 v55.21,63.41
  Bottom 0.254: v75.49,54.91 62.57,54.91 v61.73,55.75 | v55.55,56.33 55.55,63.01 | 55.55,63.01 55.55,63.07 v55.21,63.41 | v55.21,63.41 55.21,63.35 55.55,63.01 | JP2.2 29.72,73.46 32.59,70.59 32.59,51.78 34.29,50.08 48.56,50.08 49.35,50.86 49.35,57.92 50.99,59.56 52.22,59.56 52.63,59.97 52.63,63.52 52.98,63.84 54.65,63.84 v55.21,63.41
RXD3
  Top 0.254: U4.6 53.6,12.24 53.19,12.65 53.19,17.53 55.22,19.56 66.22,19.56 68.2,21.54 68.2,41.22 70.23,43.26 73.41,43.26 S1.P1-TA
RXD4  (via drill 0.6)
  Top 0.203: v56.73,36.3 56.73,36.32 | 56.73,36.32 56.73,42.98 U6.2 | 56.73,36.32 56.73,43.01
  Top 0.254: RX4.C 75.31,47.9 75.97,47.24 75.97,38.2 75.84,38.08 74.88,38.08 S1.P1-TB
  Bottom 0.203: 71.07,37.16 57.59,37.16 v56.73,36.3
  Bottom 0.254: 71.07,37.16 71.7,36.52 73.33,36.52 S1.P1-TB
SS
  Top 0.203: U7.45 46.19,57.26 46.47,56.98 47.55,56.98 48.84,55.69 48.84,49.47 47.16,47.78
  Top 0.254: 47.16,47.78 34.98,47.78 34.56,47.36 34.56,44.23 31.39,41.07 26.49,41.07 26.16,40.74 26.16,30.62 25.77,30.23 | 25.77,30.23 25.25,29.7 23.26,29.7 R3.2 | R17.2 26.17,29.82 25.77,30.23
SS-D
  Top 0.203: 40.2,57.02 40.2,58.08 U7.33
  Top 0.254: R10.2 20.48,42.76 21.72,44.01 30.8,44.01 31.76,44.97 31.76,55.02 32.7,55.96 39.13,55.96 40.2,57.02
  Top 0.406: R9.1 R10.2
SS-ECU-RELAY
  Top 0.254: CARD1.25 14.46,27.94 16.31,29.78 21.19,29.78 R3.1
TX  (via drill 0.6)
  Top 0.203: U7.51 51.09,61.11
  Top 0.254: 51.09,61.11 51.28,60.91 51.28,53.72 52.63,52.38 60.71,52.38 61.34,51.74 61.34,45.31 62.15,44.5 67.54,44.5 v68.28,43.76
  Bottom 0.254: v68.28,43.76 68.28,40.97 69.32,39.93 S1.P2
TXD0  (via drill 0.6)
  Top 0.203: U7.60 50.77,65.61
  Top 0.254: U3.4 26.16,82.86 JP3.1 28.71,82.27 29.38,81.61 29.38,80.44 29.76,80.06 46.33,80.06 v46.6,80.35 | v61.56,62.22 60.91,62.22 56.53,66.6 56.53,71.7 55.85,72.38 51.08,72.38 | 51.08,72.38 48.95,72.38 v48.74,72.07 | 50.77,65.61 51.18,66.02 51.18,72.28 51.08,72.38
  Top 0.406: TX1.C 75.27,62.31 v75.36,62.22
  Bottom 0.254: v46.6,80.35 46.6,77.55 v46.24,77.19 46.24,72.83 47,72.07 v48.74,72.07 | v75.36,62.22 v61.56,62.22
TXD1  (via drill 0.6)
  Top 0.203: U7.22 34.51,65.11
  Top 0.254: U1.4 26.39,70.76 JP1.1 | TX2.C 75.29,57.58 v75.35,57.52 | v61.65,57.52 53.54,57.52 v53.26,57.24 | 34.51,65.11 33.07,66.55 31.67,66.55 v31.61,66.61
  Bottom 0.254: v75.35,57.52 v61.65,57.52 61.63,57.53 | v53.26,57.24 51.61,57.24 51.22,56.84 51.22,50.7 49.19,48.67 33.25,48.67 30.18,51.74 30.18,62.73 27.96,64.94 25.27,64.94 24.88,65.33 24.88,69.36 25.13,69.61 26.2,69.61 JP1.1 26.96,70.19 29.88,70.19 31.6,68.48 v31.61,66.61
TXD2  (via drill 0.6)
  Top 0.203: U7.54 54.12,62.61
  Top 0.254: U2.3 26.21,75.67 JP2.1 | TX3.C 75.36,52.68 v75.39,52.7 | v61.54,53.96 55.21,53.96 v54.56,54.61 | 54.12,62.61 v54.55,62.08
  Bottom 0.254: v75.39,52.7 62.8,52.7 v61.54,53.96 | v54.55,62.08 54.56,61.98 v54.56,54.61 55.21,53.96 55.83,53.96 56.78,54.91 56.78,57.24 56.26,57.76 56.26,62.05 56.54,62.33 56.54,63.88 55.8,64.62 52.79,64.62 52.01,63.83 52.01,60.3 51.85,60.15 50.7,60.15 48.86,58.31 48.86,51.14 48.39,50.67 34.58,50.67 33.19,52.07 33.19,71.07 28,76.25 JP2.1
TXD3
  Top 0.254: U4.5 54.9,17.46 56.29,18.85 66.37,18.85 68.86,21.34 68.86,40.59 70.26,41.99 72.68,41.99 S1.P2-TA
TXD4  (via drill 0.6)
  Top 0.254: TX4.C 75.36,50.22 v75.54,50.04 | v75.01,32.33 72.31,32.33 71.53,33.12 71.53,36.72 S1.P2-TB
  Bottom 0.254: U6.3 54.55,38.71 55.45,37.82 72.63,37.82 S1.P2-TB | v75.54,50.04 75.54,47.73 76.59,46.55 76.59,33.71 v75.01,32.33
U1-EN
  Top 0.203: 33.88,64.61 U7.23
  Top 0.254: U1.3 U1.2 21.04,68.22 20.71,67.89 20.74,66.12 21.14,65.71 32.7,65.7 33.88,64.61
U3-EN
  Top 0.203: 48.77,65.1 U7.59
  Top 0.254: U3.3 U3.2 20.93,80.31 20.71,80.1 20.71,78.33 21.01,78.04 44.53,78.04 45.12,77.44 45.12,71.97 46.23,70.87 47.65,70.87 48.26,70.31 48.26,65.61 48.77,65.1

## Text on the board
_tsilk: U9 | R43 | C7 | + | VIN | R11 | + | 3V3 | C12 | U3 | S2 | JP3 | JP2 | ICSP | "ECU" | U2 | Electronic Control Unit | JP1 | U7 | R14 | + | RJ | U1 | LED2 | + | U5 | R1 | RX1 | + | R2 | TX1 | + | R4 | RX2 | + | R5 | C1 | TX2 | + | Y1 | C16 | U8 | R6 | RX3 | + | R8 | TX3 | C15 | C20 | R13 | + | C21 | TX4 | R7 | + | R20 | C14 | RX4 | R12 | 1 | R9 | R10 | R21 | R16 | R3 | LED3 | R17 | C18 | R52 | SJ2 | U15 | C6 | R18 | R53 | C19 | TX5 | R29 | R19 | RX5
_bsilk: R25 | C13 | C22 | R15 | C2 | C3 | C5 | C10 | C23 | C9 | C4 | C11 | C17 | C8